# Altium PCB PCB1.PcbDoc
Units mil, origin at the board's own origin, x right, y up, seen from the top; angles counter-clockwise.
Board outline 2559.06 x 2559.06 mil, 2 copper layers (Top Layer, Bottom Layer); 33 components, 39 nets, 153 pads, 23 vias.
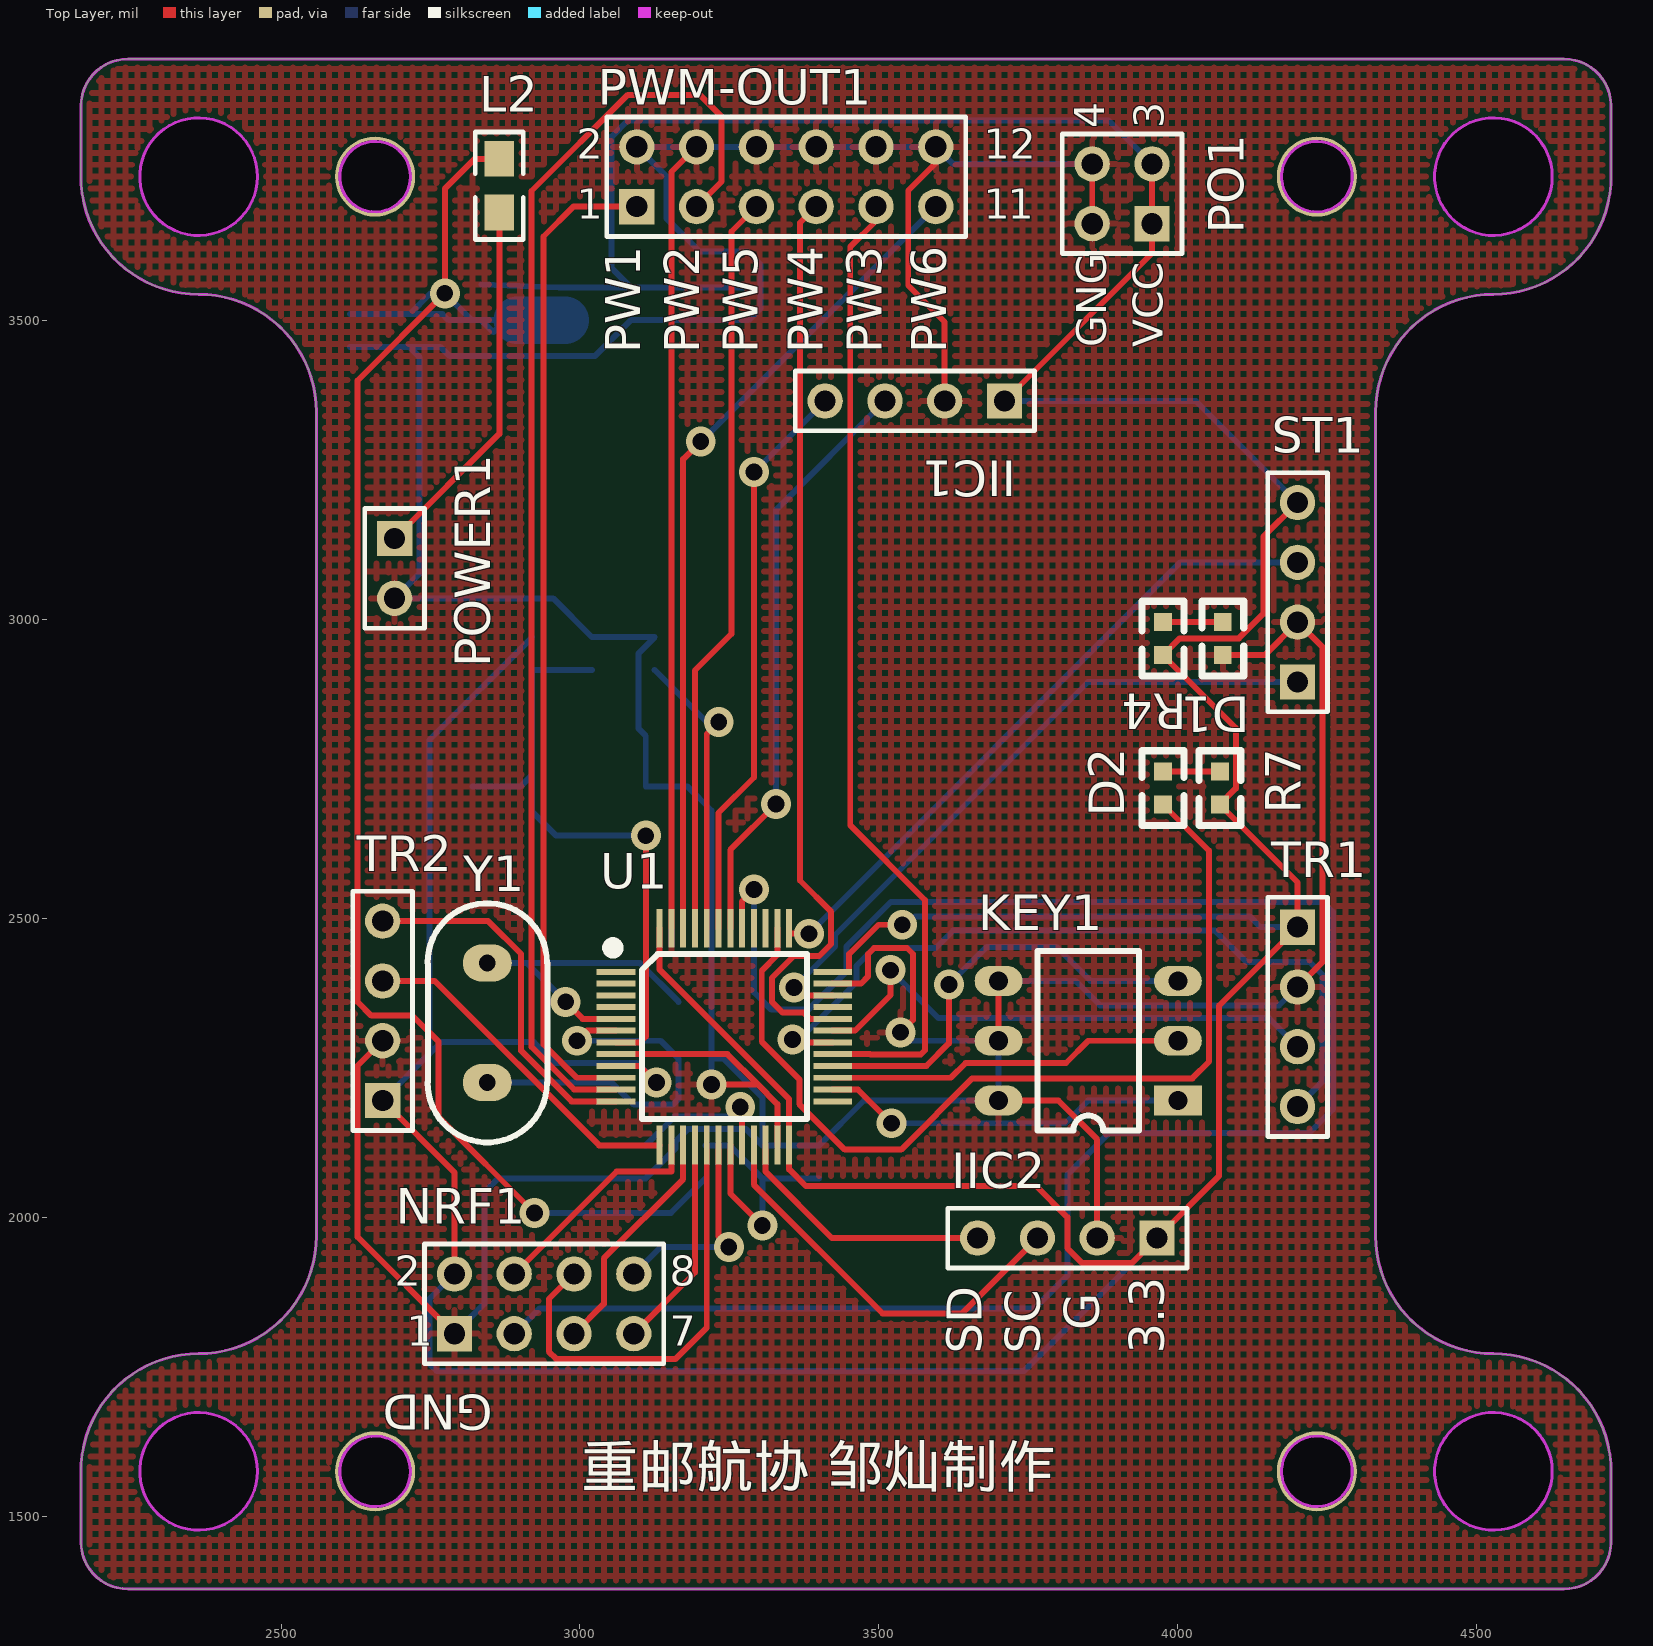
[diagram p0: Top Layer view]
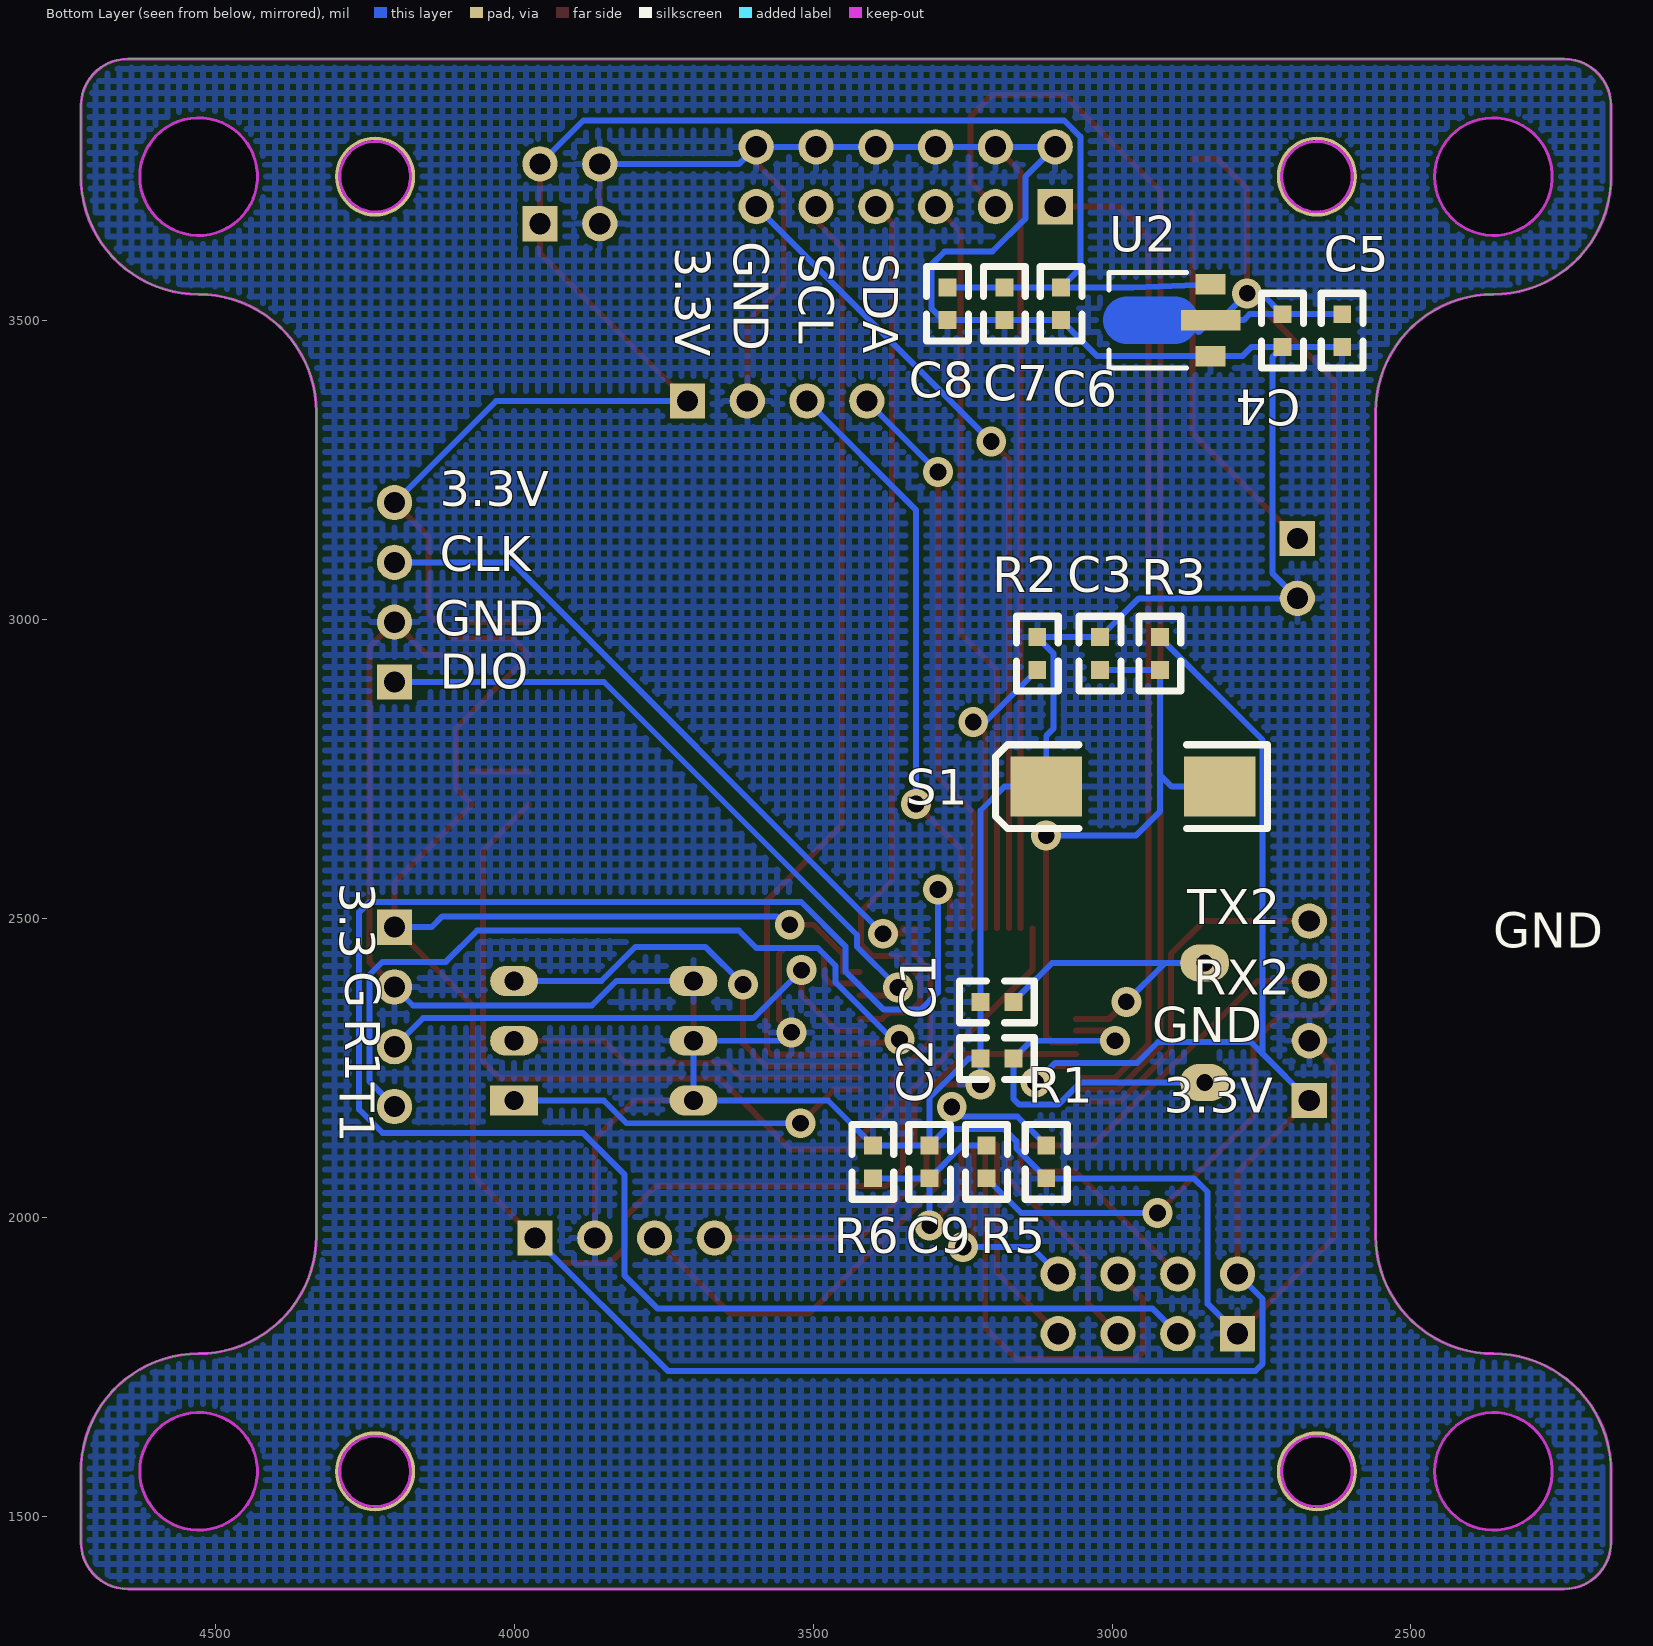
[diagram p1: Bottom Layer view, seen from below]

## Layer stack, top to bottom
Top Solder: solder mask 0.4, Solder Resist, Dk 3.5
Top Layer: signal copper 1.4
Dielectric 1: dielectric 12.6, FR-4, Dk 4.8
Bottom Layer: signal copper 1.4
Bottom Solder: solder mask 0.4, Solder Resist, Dk 3.5

## Board outline
2165.35,1456.69 ccw(c2244.09,1456.69) 2244.09,1377.95 4645.67,1377.95 ccw(c4645.67,1456.69) 4724.41,1456.69 4724.41,1574.8 ccw(c4527.56,1574.8) 4527.56,1771.65 cw(c4527.56,1968.5) 4330.71,1968.5 4330.71,3346.46 cw(c4527.56,3346.46) 4527.56,3543.31 ccw(c4527.56,3740.16) 4724.41,3740.16 4724.41,3858.27 ccw(c4645.67,3858.27) 4645.67,3937.01 2244.09,3937.01 ccw(c2244.09,3858.27) 2165.35,3858.27 2165.35,3740.16 ccw(c2362.2,3740.16) 2362.2,3543.31 cw(c2362.2,3346.46) 2559.05,3346.46 2559.06,3346.46 2559.06,1968.5 2559.05,1968.5 cw(c2362.2,1968.5) 2362.2,1771.65 ccw(c2362.2,1574.8) 2165.35,1574.8

## Design rules (kind name [scope] priority, off if disabled: settings)
Clearance [All] p1: gap=7
PolygonConnect [All] p1: connectstyle=Relief reliefconductorwidth=10 reliefentries=4 polygonreliefangle="90 Angle" airgapwidth=10
RoutingVias [All] p1: holewidth=28 width=50 viastyle="Through Hole" minholewidth=28 minwidth=50 maxholewidth=28 maxwidth=50
SolderMaskExpansion [All] p1: expansion=4
UnpouredPolygon [All] p1: allowunpoured=FALSE
Width [All] p1: maxlimit=10 minlimit=10 preferedwidth=10
29 further rules are at their usual default settings.

## Components (designator, comment, footprint, x,y, rotation, side; value= is the part's Value field where it differs from the comment)
C1 "cap" 0603c 3220,2360 r180 bottom
C2 "cap" 0603c 3220,2265 r180 bottom
C3 "cap" 0603c 3020,2970 r270 bottom
C4 "cap" 0603c 2715,3455 r90 bottom
C5 "cap" 0603c 2615,3455 r90 bottom
C6 "cap" 0603c 3085,3500 r90 bottom
C7 "cap" 0603c 3180,3500 r90 bottom
C8 "cap" 0603c 3275,3500 r90 bottom
C9 "cap" 0603c 3305,2120 r270 bottom
D1 "LED0" 0603c 4075,2995 r270 top
D2 "LED0" 0603c 3975,2745 r270 top
IIC1 "Header 4" HDR1X4 3710,3365 r180 top
IIC2 "Header 4" HDR1X4 3965,1965 r180 top
KEY1 "SW DIP-3" DIP6 4000,2195 r180 top
L2 "Inductor" 0805 2865,3680 r90 top
NRF1 "Header 4X2" HDR2X4 2790,1805 r0 top
PO1 "Header 2X2" HDR2X2 3956.69,3661.42 r90 top
POWER1 "Header 2" HDR1X2 2690,3135 r270 top
PWM-OUT1 "Header 6X2" HDR2X6 3095,3690 r0 top
R1 "res" 0603c 3110,2120 r270 bottom
R2 "res" 0603c 3125,2970 r270 bottom
R3 "res" 0603c 2920,2970 r270 bottom
R4 "res" 0603c 3975,2940 r90 top
R5 "res" 0603c 3210,2065 r90 bottom
R6 "res" 0603c 3400,2065 r90 bottom
R7 "res" 0603c 4070,2690 r90 top
S1 "" 7243 3110,2720 r0 bottom
ST1 "Header 4" HDR1X4 4200,2895 r90 top
TR1 "Header 4" HDR1X4 4200,2485 r270 top
TR2 "Header 4" HDR1X4 2670,2195 r90 top
U1 "STM32F103C8T6" LQFP48S 3060,2410 r0 top
U2 "XC6203E" SOT-89 2835,3440 r90 bottom
Y1 "5032xtal" XTAL 2845,2325 r90 top

## Footprints (in the part's own frame and the unit in brackets; to place one, negate y for a bottom-side part, rotate by r counter-clockwise, add the part's x,y. Pads: shape width x height; smd on the part's side, far side on the other; paste and mask are expansions set on the pad)
0603c [mil]
  rect 30x30 smd: 1(0,0) 2(55,0)
  silkscreen extent -35,-35 90,35
0805 [mil]
  rect 60x50 smd: 1(0,0) 2(90,0)
  silkscreen extent -45,-40 135,40
7243 [mil]
  rect 120x100 smd: 1(0,0) 2(-290,0)
  silkscreen extent -370,-70 85,70
DIP6 [mil]
  rect 80x50 hole 32: 1(0,0)
  oval 80x50 hole 32: 2(0,-100) 3(0,-200) 4(300,-200) 5(300,-100) 6(300,0)
  silkscreen extent 65,-250 235,50
HDR1X2 [mm] "Connector; Header; 2 Position"
  rect 1.5x1.5 hole 0.9: 1(0,0)
  round 1.5 hole 0.9: 2(2.54,0)
  silkscreen extent -1.27,-1.27 3.81,1.27
HDR1X4 [mm] "Connector; Header; 4 Position"
  rect 1.5x1.5 hole 0.9: 1(0,0)
  round 1.5 hole 0.9: 2(2.54,0) 3(5.08,0) 4(7.62,0)
  silkscreen extent -1.27,-1.27 8.89,1.27
HDR2X2 [mm] "Connector; Header; 2x2 Position"
  rect 1.5x1.5 hole 0.9: 1(0,0)
  round 1.5 hole 0.9: 2(0,2.54) 3(2.54,0) 4(2.54,2.54)
  silkscreen extent -1.27,-1.27 3.81,3.81
HDR2X4 [mm] "Connector; Header; 4x2 Position"
  rect 1.5x1.5 hole 0.9: 1(0,0)
  round 1.5 hole 0.9: 2(0,2.54) 3(2.54,0) 4(2.54,2.54) 5(5.08,0) 6(5.08,2.54) 7(7.62,0) 8(7.62,2.54)
  silkscreen extent -1.27,-1.27 8.89,3.81
HDR2X6 [mm] "Connector; Header; 6x2 Position"
  rect 1.5x1.5 hole 0.9: 1(0,0)
  round 1.5 hole 0.9: 2(0,2.54) 3(2.54,0) 4(2.54,2.54) 5(5.08,0) 6(5.08,2.54) 7(7.62,0) 8(7.62,2.54) 9(10.16,0) 10(10.16,2.54) 11(12.7,0) 12(12.7,2.54)
  silkscreen extent -1.27,-1.27 13.97,3.81
LQFP48S [mil] "DPIN-0.5"
  rect 65x10 smd: 1(0.42,0.29) 2(0.42,-19.39) 3(0.42,-39.08) 4(0.42,-58.76) 5(0.42,-78.45) 6(0.42,-98.13) 7(0.42,-117.82) 8(0.42,-137.5) 9(0.42,-157.19) 10(0.42,-176.87) 11(0.42,-196.56) 12(0.42,-216.24) 25(362.63,-216.24) 26(362.63,-196.56) 27(362.63,-176.87) 28(362.63,-157.19) 29(362.63,-137.5) 30(362.63,-117.82) 31(362.63,-98.13) 32(362.63,-78.45) 33(362.63,-58.76) 34(362.63,-39.08) 35(362.63,-19.39) 36(362.63,0.29)
  rect 10x65 smd: 13(73.26,-289.08) 14(92.94,-289.08) 15(112.63,-289.08) 16(132.31,-289.08) 17(152,-289.08) 18(171.68,-289.08) 19(191.37,-289.08) 20(211.05,-289.08) 21(230.74,-289.08) 22(250.42,-289.08) 23(270.11,-289.08) 24(289.79,-289.08) 37(289.79,73.13) 38(270.11,73.13) 39(250.42,73.13) 40(230.74,73.13) 41(211.05,73.13) 42(191.37,73.13) 43(171.68,73.13) 44(152,73.13) 45(132.31,73.13) 46(112.63,73.13) 47(92.94,73.13) 48(73.26,73.13)
  silkscreen extent -10,-246 319,46
SOT-89 [mil]
  rect 34x50 smd: 1(0,0) 3(120,0)
  rect 34x100 smd: 2(60,0)
  Top Layer lines w80: 60,60 60,140
  silkscreen extent -20,40 140,170
XTAL [mil]
  oval 62x82 hole 28: 1(-100,0) 2(100,0)
  silkscreen extent -200,-100 200,100

## Part data
D1 D2: "Typical INFRARED GaAs LED"
IIC1 IIC2 ST1 TR1 TR2: "Header, 4-Pin"
KEY1: "DIP Switch"
NRF1: "Header, 4-Pin, Dual row"
PO1: "Header, 2-Pin, Dual row"
POWER1: "Header, 2-Pin"
PWM-OUT1: "Header, 6-Pin, Dual row"
S1: library part 微动开关
U2: library part XC6203

## Free pads (board coordinates)
  round 133.86 hole 122.05: 0(2657.48,1574.8) 1(4232.28,1574.8) 2(4232.28,3740.16) 3(2657.48,3740.16)
  round 196.85 hole 196.85: 7(4527.56,1574.8) 8(4527.56,3740.16) 9(2362.2,3740.16) 10(2362.2,1574.8)

## Via types
v1: diameter 50, hole 28, Top Layer to Bottom Layer, 23 vias

## Nets (pads, with @x,y where several pads share a name; then routed paths per layer and width w, separated by ;. In a path a pad name is that pad's centre, name@x,y a point inside that pad or via, vN(x,y) a via of type N, cw(c..) or ccw(c..) an arc to the next point about the centre after c; other vN are vias at no path point)
3.3V: C6.2 C7.2 C8.2 IIC1.1 IIC2.1 NRF1.2 PO1.1 PO1.3 R3.1 R4.1 R7.1 ST1.4 TR1.1 TR2.1 U1.9 U1.24 U1.36 U1.48 U2.3 | length 9559.7
  Top Layer w10: TR2.1 2790,2075 NRF1.2 ; U1.9 3100,2252.81 v1(3127.81,2225) ; U1.48 3133.26,2414 3349.79,2197.47 U1.24 3349.79,2080 3377.79,2052 3763,2052 3815,2000 3815,1948 3840,1923 3923,1923 IIC2.1 4069,2069 4069,2354 TR1.1 4200,2560 R7.1 4097,2717 4097,2818 R4.1 4003,2968 4102,2968 4143,3009 4143,3138 ST1.4 ; U1.36 3450.13,2410.29 3450.13,2440 3499.13,2489 v1(3539,2489) ; IIC1.1 3956.69,3611.69 PO1.1 PO1.3
  Bottom Layer w10: TR2.1 2748,2273 ; NRF1.2 2748,1863 2748,1755 2760,1743 3743,1743 IIC2.1 ; U2.3 2965,3555 C6.2 ; R3.1 2748,2798 2748,2273 ; v1(3127.81,2225) 3094.81,2258 2958,2258 2923,2293 2768,2293 2748,2273 ; C8.2 C7.2 C6.2 ; v1(3539,2489) 3546,2489 3560,2503 4120,2503 4138,2485 TR1.1 ; IIC1.1 4030,3365 ST1.4 ; PO1.3 3884.11,3834 3080,3834 3053,3807 3053,3587 C6.2
AD: C9.2 R5.2 R6.1 U1.19 | length 448.9
  Top Layer w10: U1.19 3251.37,2039.63 v1(3305,1986)
  Bottom Layer w10: R5.2 3250,2120 C9.2 ; v1(3305,1986) C9.2 ; R6.1 C9.2
GND: C1.1 C2.1 C3.1 C4.1 C5.1 C6.1 C7.1 C8.1 C9.1 D1.2 IIC1.2 IIC2.2 KEY1.4 KEY1.5 KEY1.6 NRF1.1 PO1.2 PO1.4 POWER1.2 PWM-OUT1.2 PWM-OUT1.4 PWM-OUT1.6 PWM-OUT1.8 PWM-OUT1.10 PWM-OUT1.12 R1.2 R2.1 R6.2 S1.1 ST1.2 TR1.2 TR2.2 U1.8 U1.23 U1.35 U1.47 U2.1 | length 10353.3
  Top Layer w10: TR2.2 2628,2253 2628,1967 NRF1.1 ; U1.8 3246.54,2272.5 3297.03,2222 ; U1.47 3152.94,3747.94 PWM-OUT1.4 ; v1(3220,2222) 3297.03,2222 ; U1.23 3330.11,2188.92 3297.03,2222 ; U1.35 3470,2390.61 3482,2402.61 3482,2440 3492,2450 3547,2450 3557,2440 3557,2330 v1(3536,2309) ; PWM-OUT1.12 3595,3763 3549,3717 3549,3558 3610,3497 IIC1.2 ; KEY1.6 3800,2195 3865,2130 IIC2.2 ; KEY1.5 KEY1.4 ; PO1.2 PO1.4 ; D1.2 4145,2940 ST1.2 4242,2953 4242,2427 TR1.2
  Bottom Layer w10: C5.1 C4.1 ; NRF1.1 2840,1855 2840,2042 2863,2065 R1.2 3160,2115 3160,2127 3180,2147 3278,2147 C9.1 ; v1(3220,2222) C2.1 ; v1(3536,2309) 3550,2295 KEY1.5 KEY1.6 3475,2195 R6.2 C9.1 ; KEY1.4 3829,2395 3870,2354 4169,2354 TR1.2 ; PO1.4 3623.58,3761.42 PWM-OUT1.12 PWM-OUT1.10 PWM-OUT1.8 PWM-OUT1.6 PWM-OUT1.4 PWM-OUT1.2 3145,3740 3145,3670 3200,3615 3280,3615 3302,3593 3302,3520 3282,3500 C8.1 3227,3500 C7.1 3132,3500 C6.1 3025,3440 U2.1 2782,3440 2767,3455 C4.1 ; C4.1 2732,3438 2732,3077 POWER1.2 2955,3035 C3.1 R2.1 3098,2943 3098,2817 3110,2805 S1.1 3180,2720 3220,2680 C1.1 C2.1 ; C2.1 3240,2265 3305,2200 C9.1
INC: U1.25
LED1: D2.2 U1.38 | length 1570.3
  Top Layer w10: U1.38 3330.11,2438.33 3304,2412.22 3304,2293.55 3367,2230.55 3367,2189 3443,2113 3537,2113 3656,2232 4024,2232 4052,2260 4052,2613 D2.2
MISO: NRF1.7 U1.16 | length 358.3
  Top Layer w10: NRF1.7 3192.31,1907.31 U1.16
MOSI: NRF1.6 U1.17 | length 743.8
  Top Layer w10: NRF1.6 2948,1863 2948,1775 2960,1763 3160,1763 3212,1815 U1.17
NetC1_2: C1.2 U1.5 Y1.2 | length 535.1
  Top Layer w10: v1(2976,2360) 3004.45,2331.55 U1.5
  Bottom Layer w10: Y1.2 2911,2425 ; v1(2976,2360) 2911,2425 ; C1.2 3100,2425 2911,2425
NetC2_2: C2.2 U1.6 Y1.1 | length 661.3
  Top Layer w10: v1(2995,2295) 3011.87,2311.87 U1.6
  Bottom Layer w10: Y1.1 3053,2225 3090,2188 3155,2188 3165,2198 C2.2 3135,2295 v1(2995,2295)
NetC3_2: C3.2 R3.2 S1.2 U1.7 | length 1041.6
  Top Layer w10: U1.7 3100,2292.18 3110.13,2302.31 v1(3110.13,2638)
  Bottom Layer w10: S1.2 2900,2720 2920,2740 ; C3.2 R3.2 2920,2740 ; v1(3110.13,2638) 2960,2638 2920,2678 2920,2740
NetD1_1: D1.1 R4.2 | length 100
  Top Layer w10: R4.2 D1.1
NetD2_1: D2.1 R7.2 | length 95
  Top Layer w10: D2.1 R7.2
NetR1_1: R1.1 U1.20 | length 248.9
  Top Layer w10: v1(3268,2184) 3271.05,2180.95 U1.20
  Bottom Layer w10: R1.1 3158,2168 3252,2168 v1(3268,2184)
NetR2_2: R2.2 U1.44 | length 496.2
  Top Layer w10: U1.44 3212,2808 v1(3232,2828)
  Bottom Layer w10: R2.2 3212,2828 v1(3232,2828)
PB13: KEY1.1 U1.26 | length 616.5
  Top Layer w10: U1.26 3464.56,2213.44 v1(3521,2157)
  Bottom Layer w10: v1(3521,2157) 3812,2157 3850,2195 KEY1.1
PB14: KEY1.2 U1.27 | length 603
  Top Layer w10: U1.27 3620.26,2233.13 3645,2257.87 3812.87,2257.87 3850,2295 KEY1.2
PB15: KEY1.3 U1.28 | length 741.1
  Top Layer w10: U1.28 3579.15,2252.81 3617,2290.67 v1(3617,2389)
  Bottom Layer w10: v1(3617,2389) 3680,2452 3797,2452 3854,2395 KEY1.3
PWM1: PWM-OUT1.1 U1.10 | length 1672.3
  Top Layer w10: U1.10 2994.87,2233.13 2939,2289 2939,3640 2989,3690 PWM-OUT1.1
PWM2: PWM-OUT1.3 U1.11 | length 2169.6
  Top Layer w10: U1.11 2990.36,2213.44 2919,2284.8 2919,3716 3080,3877 3200,3877 3237,3840 3237,3732 PWM-OUT1.3
PWM3: PWM-OUT1.9 U1.29 | length 1621
  Top Layer w10: U1.29 3485.04,2272.5 3485.56,2271.97 3569.88,2271.97 3577,2279.09 3577,2530.23 3452,2655.23 3452,3623 3495,3666 PWM-OUT1.9@3495,3673
PWM4: PWM-OUT1.7 U1.32 | length 1541.9
  Top Layer w10: PWM-OUT1.7 3368,3663 3368,2563 3420,2511 3420,2456.71 3400,2436.71 3357.71,2436.71 3321,2400 3321,2360 3338.98,2342.02 3374.26,2342.02 3384.73,2331.55 U1.32
PWM5: PWM-OUT1.5 U1.45 | length 1249.4
  Top Layer w10: U1.45 3192.31,2914.31 3253.47,2975.47 3253.47,3648.47 PWM-OUT1.5
PWM6: PWM-OUT1.11 U1.46 | length 1381.8
  Top Layer w10: U1.46 3172.63,3267.63 v1(3202,3297)
  Bottom Layer w10: v1(3202,3297) PWM-OUT1.11
RX1: TR1.3 U1.31 | length 896.8
  Top Layer w10: U1.31 3460,2311.87 3519.33,2371.2 v1(3519.33,2413)
  Bottom Layer w10: v1(3519.33,2413) 3599.33,2333 4152,2333 TR1.3
RX2: TR2.3 U1.13 | length 578.1
  Top Layer w10: TR2.3 2757,2395 3032,2120 3133.26,2120 U1.13
SCL: IIC1.3 U1.42 | length 989
  Top Layer w10: U1.42 3251.37,2614.37 v1(3328,2691)
  Bottom Layer w10: v1(3328,2691) 3328,3183 IIC1.3
SCL2: IIC2.3 U1.21 | length 682.3
  Top Layer w10: U1.21 3290.74,2054.26 3506,1839 3639,1839 IIC2.3
SDA: IIC1.4 U1.43 | length 955.7
  Top Layer w10: U1.43 3231.68,2676 3291,2735.32 v1(3291,3246)
  Bottom Layer w10: v1(3291,3246) IIC1.4
SDA2: IIC2.4 U1.22 | length 445.5
  Top Layer w10: U1.22 3310.42,2076 3421.42,1965 IIC2.4
SWCLK: ST1.3 U1.37 | length 1116.6
  Top Layer w10: U1.37 3349.79,2474 v1(3383,2474)
  Bottom Layer w10: v1(3383,2474) 4004,3095 ST1.3
SWDIO: ST1.1 U1.34 | length 1135.1
  Top Layer w10: v1(3358,2384) 3371.08,2370.92 U1.34
  Bottom Layer w10: v1(3358,2384) 3426.44,2452.44 3426.44,2471.85 3849.59,2895 ST1.1
TX1: TR1.4 U1.30 | length 1315.4
  Top Layer w10: v1(3355.45,2297) 3360.27,2292.18 U1.30
  Bottom Layer w10: v1(3355.45,2297) 3367,2297 3462.33,2392.33 3462.33,2420 3492.33,2450 3594.92,2450 3623.92,2479 4062,2479 4114,2427 4220,2427 4242,2405 4242,2227 TR1.4
TX2: TR2.4 U1.12 | length 610
  Top Layer w10: TR2.4 2846.5,2495 2901.5,2440 2901.5,2278.26 2986,2193.76 U1.12
VCC: C4.2 C5.2 L2.2 R5.1 U2.2 | length 2916.1
  Top Layer w10: L2.2 2824,3770 2774,3720 v1(2774,3545) 2628,3399 2628,2360 2651,2337 2720,2337 2763,2294 2763,2168 v1(2924,2007)
  Bottom Layer w10: C5.2 C4.2 ; v1(2924,2007) 3152,2007 R5.1 ; 2975,3500 2895,3500 U2.2@2875,3500 ; C4.2 2750,3545 v1(2774,3545) U2.2@2819,3500 ; C4.2 2770,3510 2780,3500 U2.2@2819,3500 ; U2.2@2819,3500 U2.2 ; U2.2 U2.2@2875,3500 ; U2.2 2855,3480 U2.2@2875,3500
VCC_BAT: L2.1 POWER1.1 | length 617.5
  Top Layer w10: POWER1.1 2865,3310 L2.1
W_CE: NRF1.3 U1.41 | length 3284.7
  Top Layer w10: U1.41 3271.05,2528.05 v1(3291,2548)
  Bottom Layer w10: NRF1.3 2932,1847 3760,1847 3815,1902 3815,2071 3885,2141 4220,2141 4259,2180 4259,2510 4242,2527 3520,2527 3445.33,2452.33 3445.33,2410.33 3382,2347 3320,2347 3291,2376 v1(3291,2548)
W_CSN: NRF1.4 U1.14 | length 378.7
  Top Layer w10: NRF1.4 3061,2076 3152.94,2076 U1.14
W_IRQ: NRF1.8 U1.18 | length 355.7
  Top Layer w10: U1.18 3231.68,1967.32 v1(3249,1950)
  Bottom Layer w10: NRF1.8 3135,1950 v1(3249,1950)
W_SCK: NRF1.5 U1.15 | length 391.6
  Top Layer w10: NRF1.5 3040,1855 3040,1931 3172.63,2063.63 U1.15
pads on no net: U1.1 U1.2 U1.3 U1.4 U1.33 U1.39 U1.40

## Polygon pours and split planes (outlines as drawn)
GND on Top Layer "Top Layer-No Net" (hatched 90Degree grid 20 track 10, remove dead copper, pour order 4): 2106.3,3986.22 2106.3,1358.27 2096.46,1348.43 2125.98,1318.9 4773.62,1318.9 4773.62,3966.54 4803.15,3996.06
GND on Bottom Layer "Top Layer-No Net" (hatched 90Degree grid 20 track 10, remove dead copper, pour order 6): 2125.98,3996.06 2116.14,3986.22 2116.14,1309.06 4763.78,1309.06 4812.99,1358.27 4812.99,3996.06

## Keep-outs
Keep-Out Layer:
  circle w5: c2657.48,1574.8 r59.06
  circle w5: c4232.28,1574.8 r59.06
  circle w5: c4232.28,3740.16 r59.06
  circle w5: c2657.48,3740.16 r59.06
  circle w5: c2362.2,3740.16 r98.43
  circle w5: c2362.2,1574.8 r98.43
  circle w5: c4527.56,1574.8 r98.43
  circle w5: c4527.56,3740.16 r98.43
  lines w5: 2165.35,1456.69 ccw(c2244.09,1456.69) 2244.09,1377.95 4645.67,1377.95 ccw(c4645.67,1456.69) 4724.41,1456.69 4724.41,1574.8 ccw(c4527.56,1574.8) 4527.56,1771.65 cw(c4527.56,1968.5) 4330.71,1968.5 4330.71,3346.46 cw(c4527.56,3346.46) 4527.56,3543.31 ccw(c4527.56,3740.16) 4724.41,3740.16 4724.41,3858.27 ccw(c4645.67,3858.27) 4645.67,3937.01 2244.09,3937.01 ccw(c2244.09,3858.27) 2165.35,3858.27 2165.35,3740.16 ccw(c2362.2,3740.16) 2362.2,3543.31 cw(c2362.2,3346.46) 2559.05,3346.46 2559.06,1968.5 cw(c2362.2,1968.5) 2362.2,1771.65 ccw(c2362.2,1574.8) 2165.35,1574.8 2165.35,1456.69

## Silkscreen, mask and mechanical layers (free items; w line width, h text height)
Top Overlay:
  text "PW1" at 3120.08,3444.88 h100 r90
  text "PW2" at 3218.5,3444.88 h100 r90
  text "PW5" at 3316.93,3444.88 h100 r90
  text "PW4" at 3425.2,3444.88 h100 r90
  text "PW3" at 3523.62,3444.88 h100 r90
  text "PW6" at 3631.89,3444.88 h100 r90
  text "G" at 3887.8,1811.02 h100 r90
  text "SD" at 3690.94,1771.65 h100 r90
  text "SC" at 3789.37,1771.65 h100 r90
  text "3.3" at 3996.06,1771.65 h100 r90
  text "GND" at 2854.33,1722.44 h100 r180
  text "重邮航协 邹灿制作" at 3001.97,1525.59 h120
Bottom Overlay:
  text "GND" at 3651.57,3631.89 h100 r90
  text "3.3V" at 3750,3622.05 h100 r90
  text "SDA" at 3435.04,3612.2 h100 r90
  text "SCL" at 3543.31,3612.2 h100 r90
  text "3.3V" at 4124.02,3169.29 h100
  text "CLK" at 4124.02,3061.02 h100
  text "GND" at 4133.86,2952.76 h100
  text "DIO" at 4124.02,2864.17 h100
  text "3.3" at 4311.02,2559.06 h100 r90
  text "TX2" at 2874.02,2470.47 h100
  text "GND" at 2362.2,2431.1 h100
  text "G" at 4301.18,2411.42 h100 r90
  text "RX2" at 2864.17,2352.36 h100
  text "R1" at 4301.18,2332.68 h100 r90
  text "GND" at 2933.07,2273.62 h100
  text "T1" at 4311.02,2224.41 h100 r90
  text "3.3V" at 2913.39,2155.51 h100

## Text inside footprints (layer, text, board x,y; h text height)
NRF1: Top Overlay "2" at 2690,1885 h50; Top Overlay "1" at 2710,1785 h50; Top Overlay "7" at 3150,1785 h50; Top Overlay "8" at 3150,1885 h50
PO1: Top Overlay "VCC" at 3975,3455 h50 r90; Top Overlay "GNG" at 3880,3455 h50 r90; Top Overlay "4" at 3876.69,3821.42 h50 r90; Top Overlay "3" at 3976.69,3821.42 h50 r90
PWM-OUT1: Top Overlay "12" at 3675,3770 h50; Top Overlay "1" at 3715,3670 h50; Top Overlay "1" at 3675,3670 h50; Top Overlay "1" at 2995,3670 h50; Top Overlay "2" at 2995,3770 h50